# Altium PCB PCB2.PcbDoc
Units mm, origin at the board's own origin, x right, y up, seen from the top; angles counter-clockwise.
Board outline 50 x 50 mm, 2 copper layers (Top Layer, Bottom Layer), stack 1.571 mm thick; 6 components, 30 nets, 51 pads, 58 vias.
Unrouted connection lines stored in the file: 2.
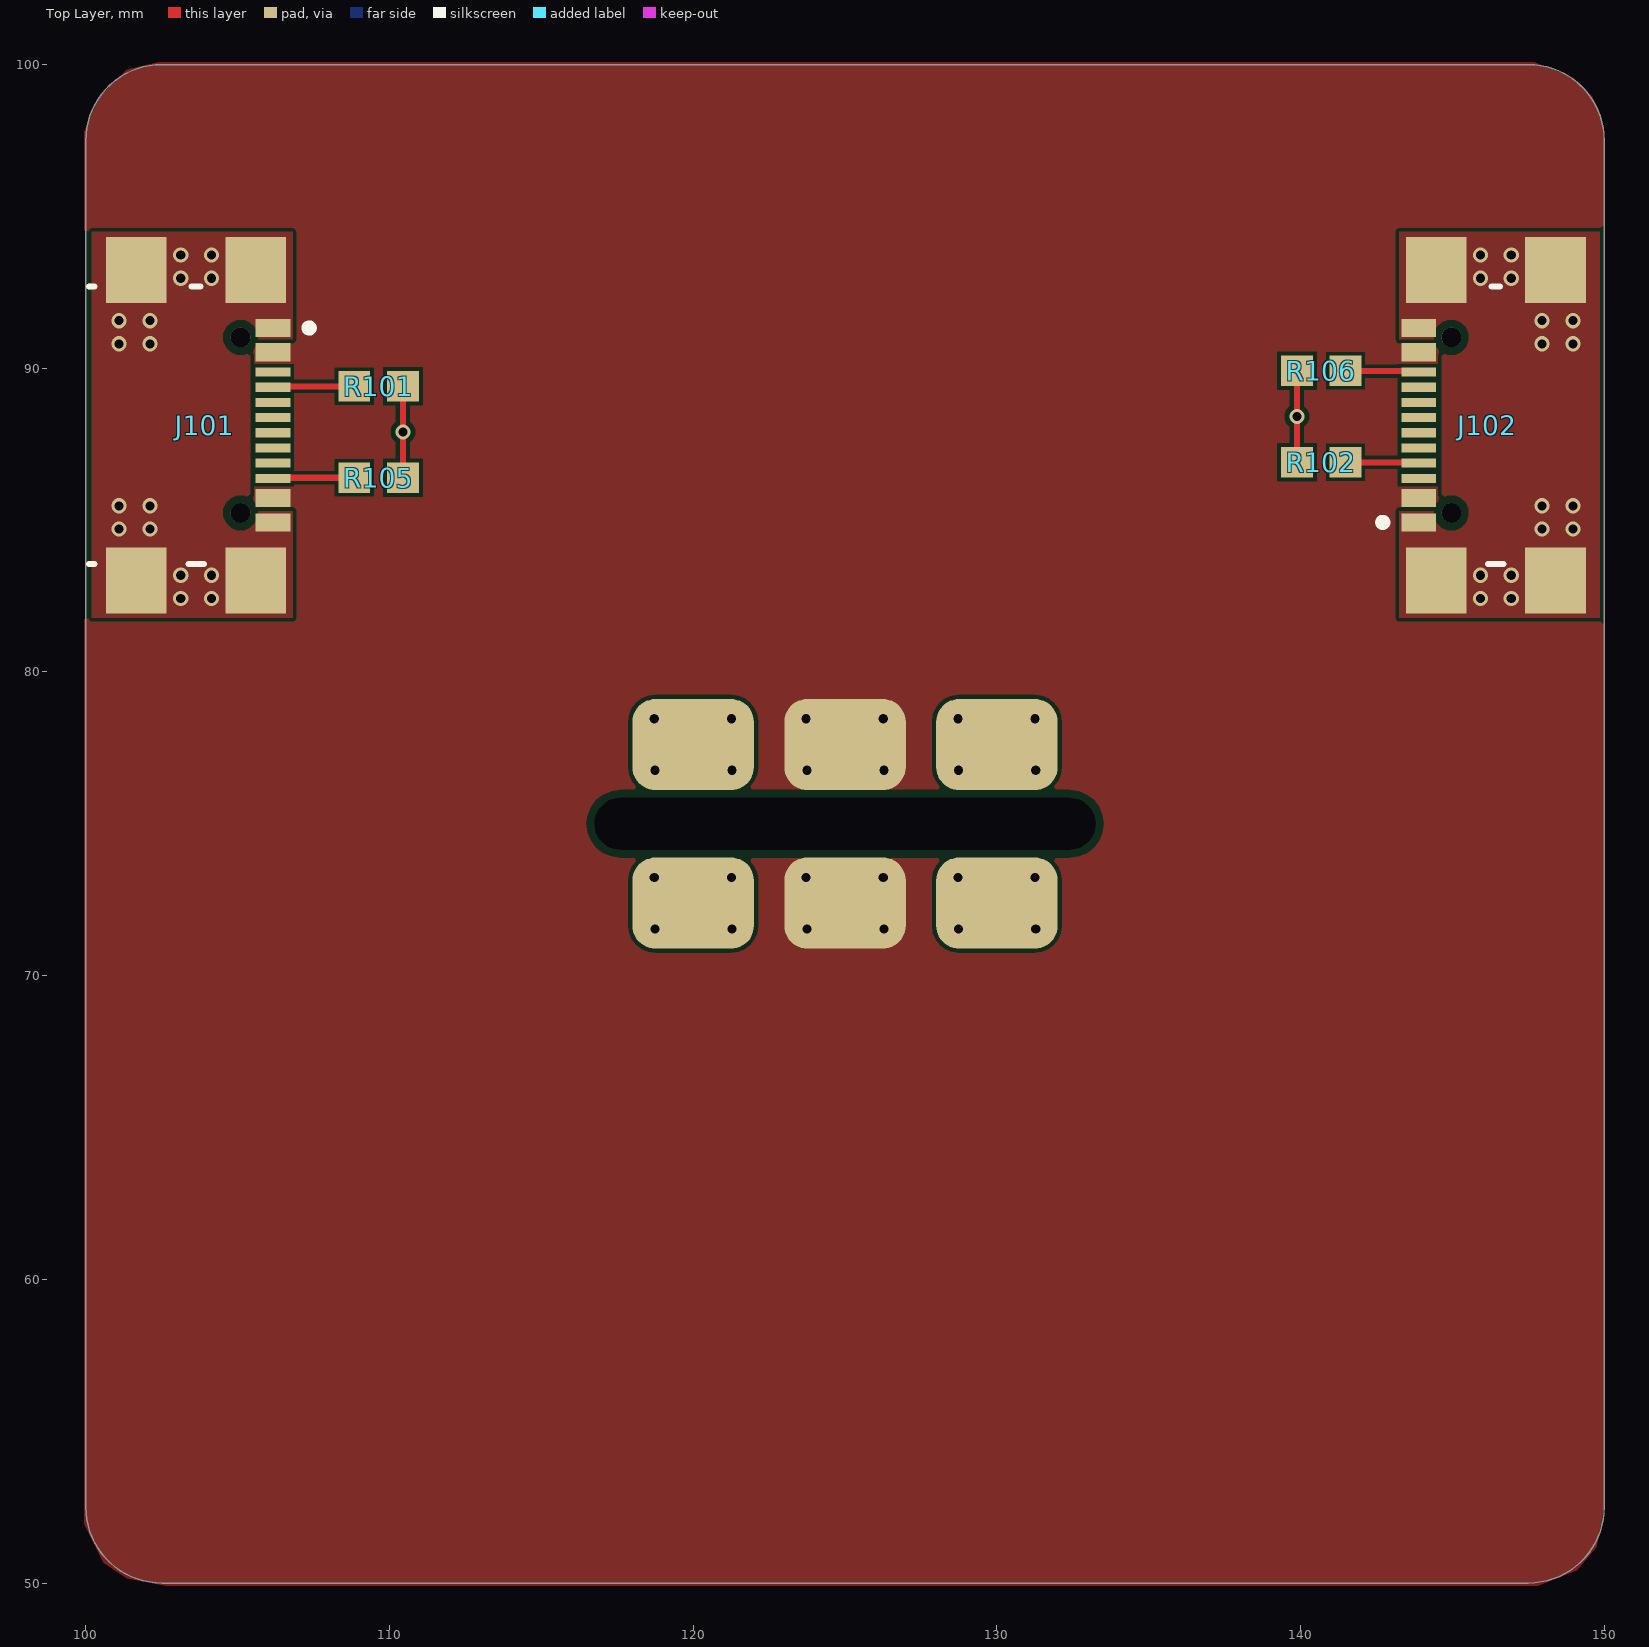
[diagram p0: Top Layer view]
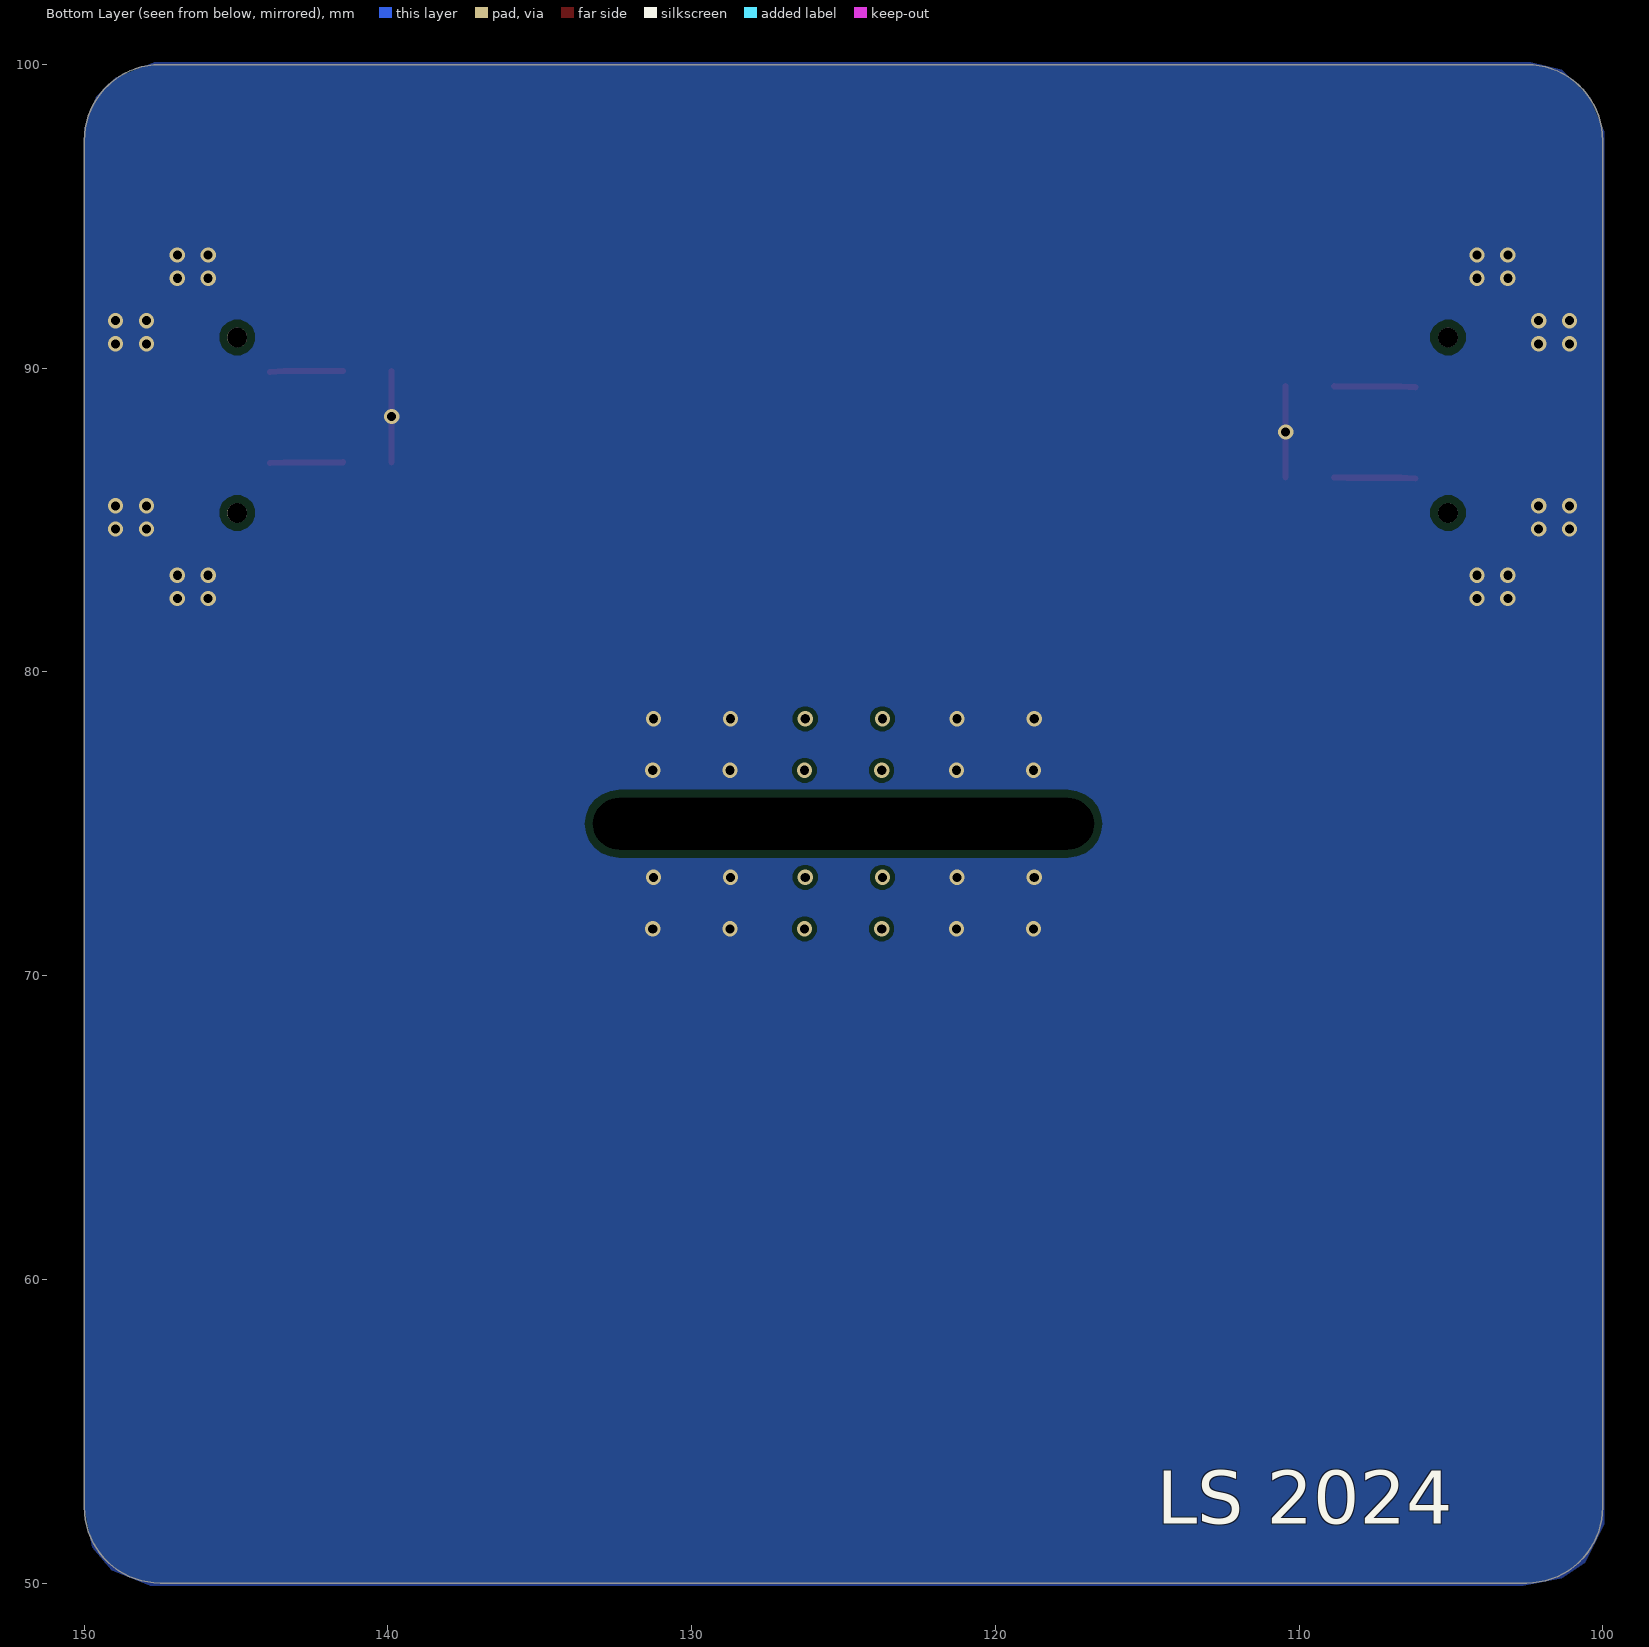
[diagram p1: Bottom Layer view, seen from below]
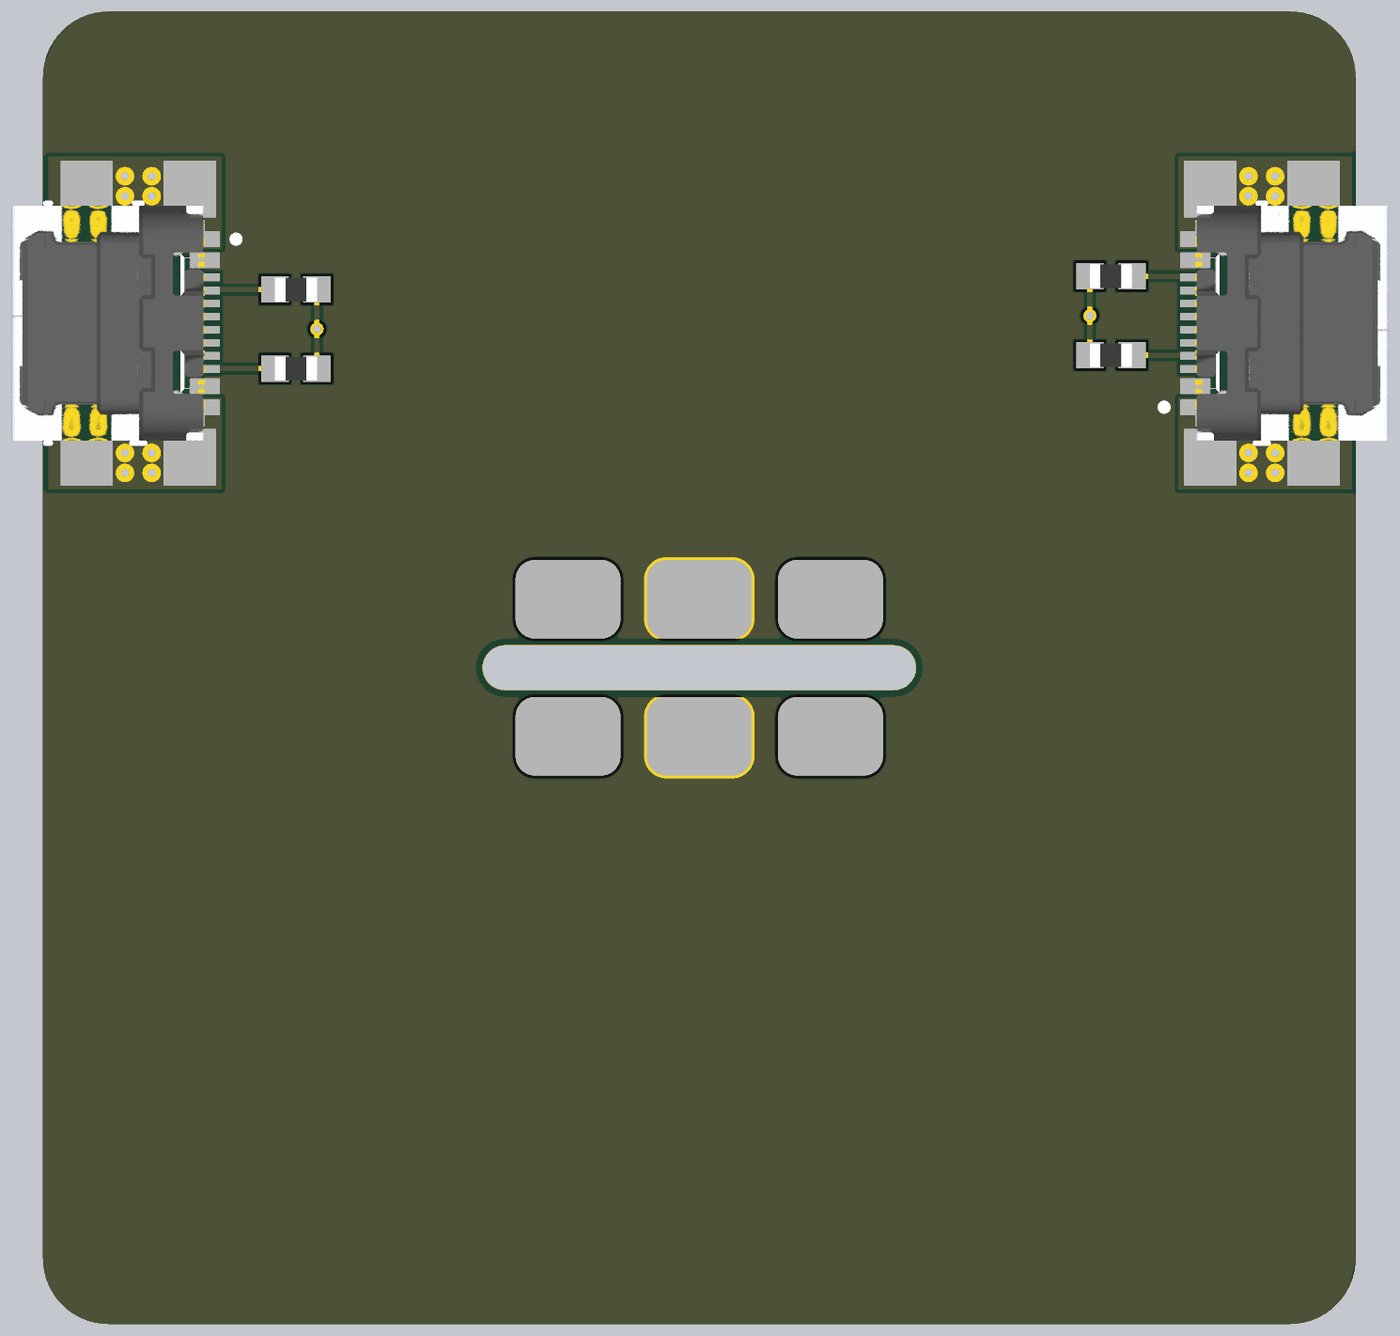
[diagram p2: 3D render of the assembled board from above, using the file's embedded part models]

## Layer stack, top to bottom
Top Solder: solder mask 0.0102, Solder Resist, Dk 3.5
Top Layer: signal copper 0.0356
Dielectric 1: dielectric 1.5, FR-4, Dk 4.8
Bottom Layer: signal copper 0.0356
Bottom Solder: solder mask 0.0102, Solder Resist, Dk 3.5

## Board outline
100,52.5 100,97.5 cw(c102.5,97.5) 102.5,100 147.5,100 cw(c147.5,97.5) 150,97.5 150,52.5 cw(c147.5,52.5) 147.5,50 102.5,50 cw(c102.5,52.5)

## Design rules (kind name [scope] priority, off if disabled: settings)
Clearance [All] p1: gap=0.127 ignorepadtopadclearanceinfootprint=TRUE except(0.254: Arc-Hole Track-Hole SMDPad-THPad SMDPad-Hole THPad-THPad THPad-Hole Via-Hole Fill-Hole Poly-Hole Region-Hole Text-Hole)
PolygonConnect [All] p1: connectstyle=Direct reliefconductorwidth=0.254 reliefentries=4 polygonreliefangle="90 Angle" airgapwidth=0.254
RoutingVias [All] p1: holewidth=0.3 width=0.5 viastyle="Through Hole" minholewidth=0.3 minwidth=0.5 maxholewidth=2539.975 maxwidth=2539.975
SolderMaskExpansion SolderMaskExpansion_VIA [IsVia] p1: expansion=-100 istentingtop=FALSE
SolderMaskExpansion [All] p2: expansion=0.102 istentingtop=FALSE
SupplyNets "Schematic Supply Nets_1" [InNet('GND')] p1: voltage=0.000
SupplyNets "Schematic Supply Nets" [InNet('+5')] p2: voltage=0.000
Width [All] p1: maxlimit=254 minlimit=0.127 preferedwidth=0.254
30 further rules are at their usual default settings.

## Components (designator, comment, footprint, x,y, rotation, side; value= is the part's Value field where it differs from the comment)
J101 "USB4110-GF-A" FP-USB4110-GF-A-MFG 102.489,88.126 r270 top
J102 "USB4110-GF-A" FP-USB4110-GF-A-MFG 147.571,88.126 r90 top
R101 "Resistor" RESC1608X06N 109.639,89.408 r180 top
R102 "Resistor" RESC1608X06N 140.678,86.906 r0 top
R105 "Resistor" RESC1608X06N 109.639,86.398 r180 top
R106 "Resistor" RESC1608X06N 140.678,89.916 r0 top

## Footprints (in the part's own frame and the unit in brackets; to place one, negate y for a bottom-side part, rotate by r counter-clockwise, add the part's x,y. Pads: shape width x height; smd on the part's side, far side on the other; paste and mask are expansions set on the pad)
FP-USB4110-GF-A-MFG [mm]
  rect 2.18x2 smd paste+0 mask+0: 1(-5.11,3.105) 2(5.11,3.105) 3(-5.11,-0.825) 4(5.11,-0.825)
  rect 0.6x1.15 smd paste+0 mask+0: A1-B12(-3.2,3.68) A4-B9(-2.4,3.68) B1-A12(3.2,3.68) B4-A9(2.4,3.68)
  rect 0.3x1.15 smd paste+0 mask+0: A5(-1.25,3.68) A6(-0.25,3.68) A7(0.25,3.68) A8(1.25,3.68) B5(1.75,3.68) B6(0.75,3.68) B7(-0.75,3.68) B8(-1.75,3.68)
  round 0.65 hole 0.65 unplated paste-2539.97 mask+0: ""(-2.89,2.605) ""(2.89,2.605)
  silkscreen extent -4.57,-2.39 4.57,4.99, body extent -6.3,-3.92 6.3,4.36, height 0.25
RESC1608X06N [mm] "Chip Resistor, 2-Leads, Body 1,55x0,85mm, IPC Medium Density"
  rect 1.05x1 smd: 1(-0.8,0) 2(0.8,0)
  body extent -0.8,-0.45 0.8,0.45, height 0.6

## Part data
J101 J102: library part CMP-245163-000002-1, "CONN USB 2.0 TYPE-C R/A SMT", Current Rating=3/4.25/1.25/0.25A, Manufacturer=GCT, Package=0, Temperature="-40°C to +85°C", Temperature Range High=+85°C, Temperature Range Low=-40°C, Voltage Rating=20V, Automotive=No, Category=Conn, ComponentLink2Description=Datasheet, ComponentLink2URL=https://gct.co/files/drawings/usb4110.pdf, Conn Orientation="Right Angle", Contact Material=Gold,Nickel, Device Class L1=Connectors, Device Class L2="USB Connectors", Device Class L3=unset, Digikey Description="CONN USB 2.0 TYPE-C R/A SMT", Height=3.46mm, Is Female=yes, Lead Free=Yes, Manufacturer Part Number=USB4110-GF-A, Number of Contacts=16, Octopart=https://octopart.com/usb4110-gf-a-gct-103941985, RoHS=TRUE, Shielding=true, Standoff Height=0.1mm, Usb Standard="USB 2.0"
R101 R102 R105 R106: library part R0603

## Free pads (board coordinates)
  rrect50% 4x3 smd: 6(120,77.61) 7(125,77.61) 8(130,77.61) 10(120,72.39) 11(125,72.39) 12(130,72.39)
  round 0 hole 1.7 slot 16.5 at 0 deg: 9(125,75)

## Via types
v1: diameter 0.5, hole 0.3, Top Layer to Bottom Layer, 58 vias

## Nets (pads, with @x,y where several pads share a name; then routed paths per layer and width w, separated by ;. In a path a pad name is that pad's centre, name@x,y a point inside that pad or via, vN(x,y) a via of type N, cw(c..) or ccw(c..) an arc to the next point about the centre after c; other vN are vias at no path point)
+5: J101.A4-B9 J101.B4-A9 J102.A4-B9 J102.B4-A9 pad.7 pad.11
  other v1: 123.741,71.542 126.281,71.542 123.719,73.238 126.259,73.238 123.741,76.762 126.281,76.762 123.719,78.458 126.259,78.458
CC1: J101.A5 J102.A5 R101.2 R102.2 | length 5.1
  Top Layer w0.2: J101.A5 106.644,89.403 108.414,89.403 R101.2 ; R102.2 141.903,86.901 143.416,86.901 J102.A5
CC2: J101.B5 J102.B5 R105.2 R106.2 | length 5.1
  Top Layer w0.2: J101.B5 106.644,86.394 108.414,86.394 R105.2 ; R106.2 141.903,89.909 143.416,89.909 J102.B5
GND: J101.1 J101.2 J101.3 J101.4 J101.A1-B12 J101.B1-A12 J102.1 J102.2 J102.3 J102.4 J102.A1-B12 J102.B1-A12 pad.6 pad.8 pad.10 pad.12 R101.1 R102.1 R105.1 R106.1 | length 6
  Top Layer w0.2: R105.1 R101.1 ; R102.1 R106.1
  other v1: 118.741,71.542 121.281,71.542 128.741,71.542 131.281,71.542 118.719,73.238 121.259,73.238 128.719,73.238 131.259,73.238 118.741,76.762 121.281,76.762 128.741,76.762 131.281,76.762 118.719,78.458 121.259,78.458 128.719,78.458 131.259,78.458 103.124,82.423 104.14,82.423 145.92,82.423 146.936,82.423 103.124,83.185 104.14,83.185 145.92,83.185 146.936,83.185 101.092,84.709 102.108,84.709 147.952,84.709 148.968,84.709 101.092,85.471 102.108,85.471 147.952,85.471 148.968,85.471 110.439,87.903 139.878,88.411 101.092,90.805 102.108,90.805 147.952,90.805 148.968,90.805 101.092,91.567 102.108,91.567 147.952,91.567 148.968,91.567 103.124,92.964 104.14,92.964 145.92,92.964 146.936,92.964 103.124,93.726 104.14,93.726 145.92,93.726 146.936,93.726
LED_DI: 
NetR103_1: 
NetTP101_TP: 
NetU102_1: 
NetU103_1: 
NetU104_1: 
NetU105_1: 
NetU106_1: 
NetU107_1: 
NetU108_1: 
NetU109_1: 
NetU110_1: 
NetU111_1: 
NetU112_1: 
NetU113_1: 
NetU114_1: 
NetU115_1: 
NetU116_1: 
NetU117_1: 
NetU118_1: 
NetU119_1: 
NetU120_1: 
NetU121_1: 
NetU122_1: 
NetU123_1: 
NetU124_1: 
pads on no net: J101. J101.A6 J101.A7 J101.A8 J101.B6 J101.B7 J101.B8 J102. J102.A6 J102.A7 J102.A8 J102.B6 J102.B7 J102.B8

## Polygon pours and split planes (outlines as drawn)
+5 on Top Layer "+5_L01_P002" (solid, pour order 2): 99.949,97.79 100.457,98.933 101.346,99.822 102.362,100.076 147.701,100.076 148.971,99.568 149.606,98.933 149.987,97.917 149.987,52.451 149.733,51.181 149.098,50.419 147.828,49.911 102.616,49.911 101.346,50.165 100.584,50.673 99.949,51.943
GND on Top Layer "GND_L01_P001" (solid, pour order 1): 149.857,94.488 143.253,94.488 143.253,90.932 144.65,90.932 144.65,85.344 143.253,85.344 143.253,81.788 149.857,81.788
GND on Top Layer "GND_L01_P000" (solid, pour order 0): 100.203,94.488 106.807,94.488 106.807,90.932 105.41,90.932 105.41,85.344 106.807,85.344 106.807,81.788 100.203,81.788
GND on Bottom Layer "GND_L02_P003" (solid, pour order 3): 99.949,97.79 100.457,98.933 101.346,99.822 102.362,100.076 147.701,100.076 148.971,99.568 149.606,98.933 149.987,97.917 149.987,52.451 149.733,51.181 149.098,50.419 147.828,49.911 102.616,49.911 101.346,50.165 100.584,50.673 99.949,51.943

## Silkscreen, mask and mechanical layers (free items; w line width, h text height)
Bottom Overlay:
  text "LS 2024" at 114.681,51.382 h3
Mechanical 1:
  the board outline again, w0.254